# Altium PCB VirtualKeyBoardMouse_2020-04-23_12-54-28.pcbdoc
Units mil, origin at the board's own origin, x right, y up, seen from the top; angles counter-clockwise.
Board outline 4520 x 3570 mil, 2 copper layers (Top Layer, Bottom Layer); 33 components, 50 nets, 177 pads, 46 vias.
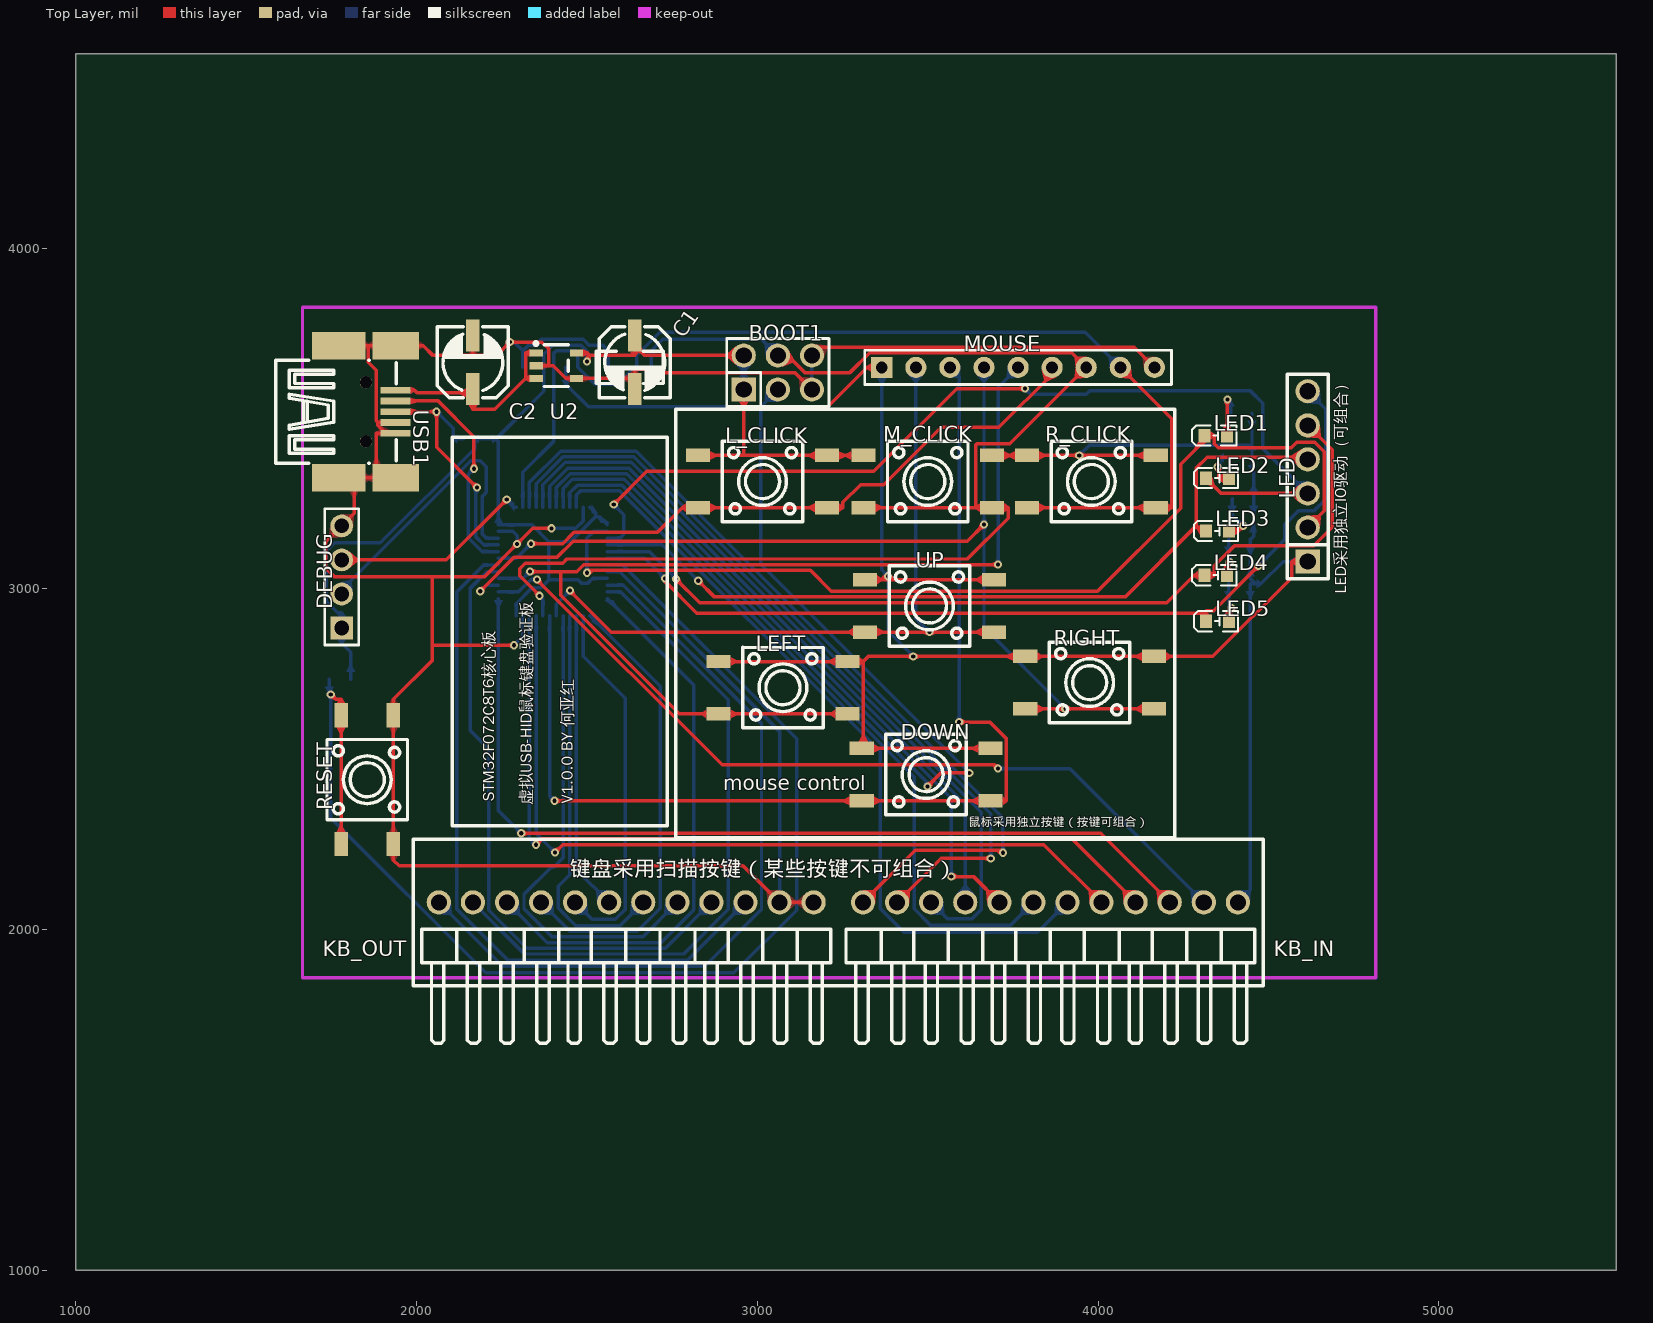
[diagram p0: Top Layer view]
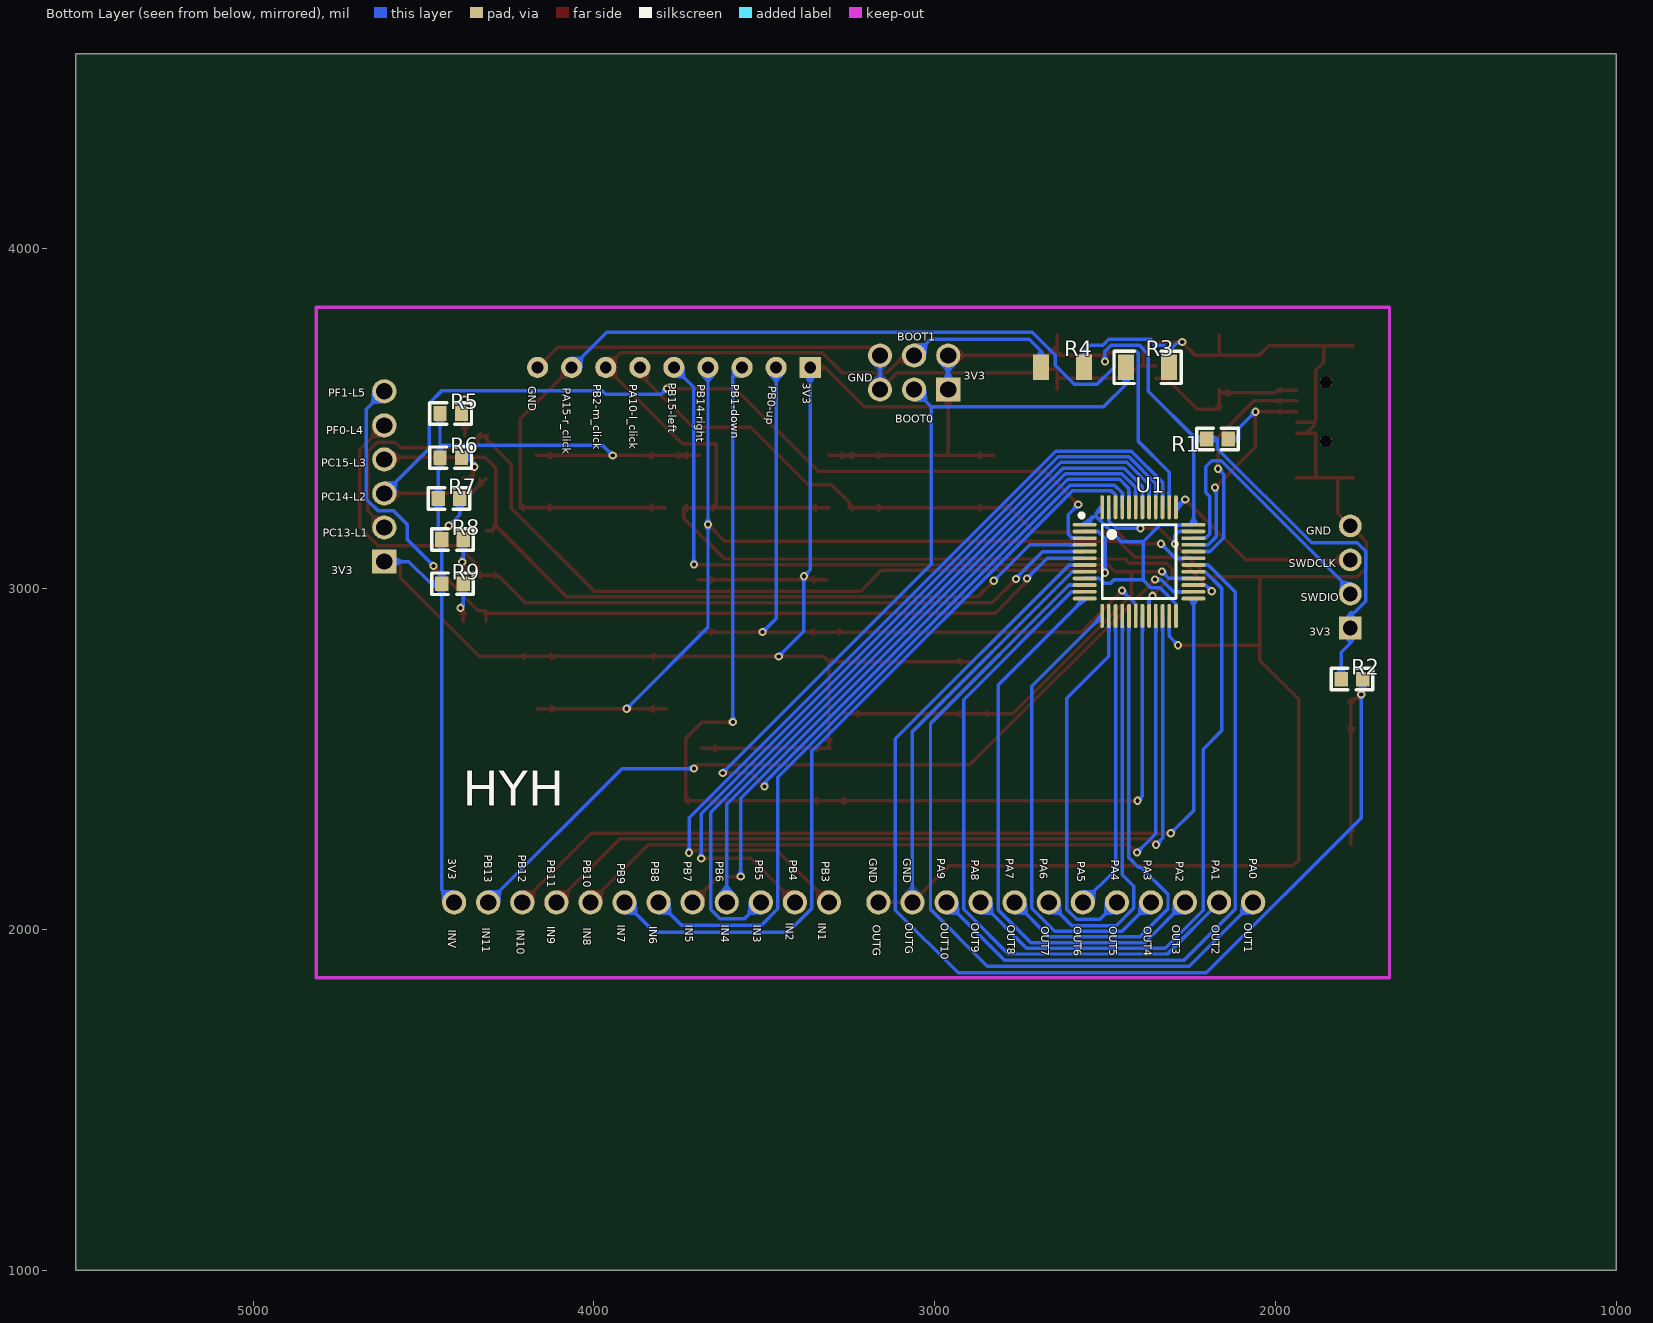
[diagram p1: Bottom Layer view, seen from below]

## Layer stack, top to bottom
Top Layer: signal copper (thickness not stored)
Dielectric: dielectric 12.6, FR-4, Dk 4.8
Bottom Layer: signal copper (thickness not stored)

## Board outline
5520,1000 1000,1000 1000,4570 5520,4570

## Components (designator, comment, footprint, x,y, rotation, side; value= is the part's Value field where it differs from the comment)
BOOT1 "210S-2*3P L=11.6MMGold-plated black" HDR-TH_6P-P2.54-V-R2-C3-S2.54 3060,3635 r0 top
C1 "100uF" CAP-SMD_BD5.0-L5.3-W5.3-FD 2640,3665 r270 top
C2 "100uF" CAP-SMD_BD5.0-L5.3-W5.3-FD 2165,3665 r90 top
DEBUG "MTP125-1104S1" HDR-TH_4P-P2.54-V 1780,3035 r90 top
DOWN "K2-6639SP-C4SC-04" KEY-SMD_4P-L6.0-W6.0-P3.90-LS10.0 3495,2455 r0 top
KB_IN "C247920" HDR-TH_12P-P2.54-H-W10.5 3860,2080 r0 top
KB_OUT "C247920" HDR-TH_12P-P2.54-H-W10.5 2615,2080 r0 top
L_CLICK "K2-6639SP-C4SC-04" KEY-SMD_4P-L6.0-W6.0-P3.90-LS10.0 3015,3315 r0 top
LED "210S-1*6P L=11.6MMGold-plated black" HDR-TH_6P-P2.54-V_Z-211-0611-0021-001 4615,3330 r90 top
LED1 "NCD0603R5" LED0603-RD 4345,3450 r0 top
LED2 "NCD0603R5" LED0603-RD 4350,3325 r0 top
LED3 "NCD0603R5" LED0603-RD 4350,3170 r0 top
LED4 "NCD0603R5" LED0603-RD 4345,3040 r0 top
LED5 "NCD0603R5" LED0603-RD 4350,2905 r0 top
LEFT "K2-6639SP-C4SC-04" KEY-SMD_4P-L6.0-W6.0-P3.90-LS10.0 3075,2710 r0 top
M_CLICK "K2-6639SP-C4SC-04" KEY-SMD_4P-L6.0-W6.0-P3.90-LS10.0 3500,3315 r0 top
MOUSE "220S-1*9P H=8.5MM Ytype Gold-plated" HDR-TH_9P-P2.54-V 3765,3650 r0 top
R1 "1K" R0603 2170,3440 r180 bottom
R2 "1K" R0603 1775,2735 r0 bottom
R3 "10K" R1206#1 2375,3650 r0 bottom
R4 "10K" R1206#2 2625,3650 r0 top
R5 "470" R0603 4420,3515 r0 bottom
R6 "470" R0603 4420,3385 r0 bottom
R7 "470" R0603 4425,3265 r0 bottom
R8 "470" R0603 4415,3145 r0 bottom
R9 "470" R0603 4415,3015 r0 bottom
R_CLICK "K2-6639SP-C4SC-04" KEY-SMD_4P-L6.0-W6.0-P3.90-LS10.0 3980,3315 r0 top
RESET "K2-6639SP-C4SC-04" KEY-SMD_4P-L6.0-W6.0-P3.90-LS10.0 1855,2440 r90 top
RIGHT "K2-6639SP-C4SC-04" KEY-SMD_4P-L6.0-W6.0-P3.90-LS10.0 3975,2725 r0 top
U1 "STM32F072CBT6" LQFP-48_L7.0-W7.0-P0.50-LS9.0-TL 2400,3080 r0 bottom
U2 "XC6219B332MR" SOT-23-5_L3.0-W1.7-P0.95-LS2.8-BL 2410,3655 r270 top
UP "K2-6639SP-C4SC-04" KEY-SMD_4P-L6.0-W6.0-P3.90-LS10.0 3505,2950 r0 top
USB1 "67503-1020" MICRO-USB-SMD_67503-1020 1855,3520 r270 top

## Footprints (in the part's own frame and the unit in brackets; to place one, negate y for a bottom-side part, rotate by r counter-clockwise, add the part's x,y. Pads: shape width x height; smd on the part's side, far side on the other; paste and mask are expansions set on the pad)
CAP-SMD_BD5.0-L5.3-W5.3-FD [mm]
  rect 2.4x1 smd: 1(-2,0) 2(2,0)
  silkscreen extent -2.65,-2.65 2.65,2.65
HDR-TH_4P-P2.54-V [mm]
  rect 1.7x1.7 hole 1.1: 1(-3.81,0)
  round 1.7 hole 1.1: 2(-1.27,0) 3(1.27,0) 4(3.81,0)
  silkscreen extent -5.08,-1.27 5.08,1.27
HDR-TH_6P-P2.54-V-R2-C3-S2.54 [mm]
  rect 1.8x1.8 hole 1.2: 1(-2.54,-1.27)
  round 1.8 hole 1.2: 2(-2.54,1.27) 3(0,-1.27) 4(0,1.27) 5(2.54,-1.27) 6(2.54,1.27)
  silkscreen extent -3.81,-2.54 3.81,2.54
HDR-TH_6P-P2.54-V_Z-211-0611-0021-001 [mm]
  rect 1.8x1.8 hole 1.2: 1(-6.35,0)
  round 1.8 hole 1.2: 2(-3.81,0) 3(-1.27,0) 4(1.27,0) 5(3.81,0) 6(6.35,0)
  silkscreen extent -7.62,-1.52 7.62,1.52
HDR-TH_9P-P2.54-V [mil]
  rect 62x62 hole 35: 1(-400,0)
  round 62 hole 35: 2(-300,0) 3(-200,0) 4(-100,0) 5(0,0) 6(100,0) 7(200,0) 8(300,0) 9(400,0)
  silkscreen extent -450,-50 450,50
HDR-TH_12P-P2.54-H-W10.5 [mm]
  round 1.8 hole 1.2: 1(-13.97,0) 2(-11.43,0) 3(-8.89,0) 4(-6.35,0) 5(-3.81,0) 6(-1.27,0) 7(1.27,0) 8(3.81,0) 9(6.35,0) 10(8.89,0) 11(11.43,0) 12(13.97,0)
  silkscreen extent -15.24,-10.5 15.24,-2
KEY-SMD_4P-L6.0-W6.0-P3.90-LS10.0 [mm]
  rect 1.8x1 smd: 1(-4.8,1.95) 2(4.8,1.95) 3(-4.8,-1.95) 4(4.8,-1.95)
  silkscreen extent -3,-3 3,3
LED0603-RD [mm]
  rect 0.9x1 smd: 1(-0.85,0) 2(0.85,0)
  silkscreen extent -1.75,-0.75 1.55,0.75
LQFP-48_L7.0-W7.0-P0.50-LS9.0-TL [mm]
  oval 1.796x0.28 smd: 1(4.05,-2.75) 2(4.05,-2.25) 3(4.05,-1.75) 4(4.05,-1.25) 5(4.05,-0.75) 6(4.05,-0.25) 7(4.05,0.25) 8(4.05,0.75) 9(4.05,1.25) 10(4.05,1.75) 11(4.05,2.25) 12(4.05,2.75) 25(-4.05,2.75) 26(-4.05,2.25) 27(-4.05,1.75) 28(-4.05,1.25) 29(-4.05,0.75) 30(-4.05,0.25) 31(-4.05,-0.25) 32(-4.05,-0.75) 33(-4.05,-1.25) 34(-4.05,-1.75) 35(-4.05,-2.25) 36(-4.05,-2.75)
  oval 0.28x1.796 smd: 13(2.75,4.05) 14(2.25,4.05) 15(1.75,4.05) 16(1.25,4.05) 17(0.75,4.05) 18(0.25,4.05) 19(-0.25,4.05) 20(-0.75,4.05) 21(-1.25,4.05) 22(-1.75,4.05) 23(-2.25,4.05) 24(-2.75,4.05) 37(-2.75,-4.05) 38(-2.25,-4.05) 39(-1.75,-4.05) 40(-1.25,-4.05) 41(-0.75,-4.05) 42(-0.25,-4.05) 43(0.25,-4.05) 44(0.75,-4.05) 45(1.25,-4.05) 46(1.75,-4.05) 47(2.25,-4.05) 48(2.75,-4.05)
  silkscreen extent -2.75,-3.6 4.42,2.75
MICRO-USB-SMD_67503-1020 [mm]
  rect 0.5x2.25 smd: 1(-1.6,2.1) 2(-0.8,2.1) 3(0,2.1) 4(0.8,2.1) 5(1.6,2.1)
  rect 2.05x3.5 smd: 6(-4.925,2.125) 6(4.925,2.125)
  rect 2.05x4 smd: 6(-4.925,-2.125) 6(4.925,-2.125)
  round 0.914 hole 0.914: ""(-2.2,-0.1) ""(2.2,-0.1)
  silkscreen extent -3.85,-6.82 3.85,2.18
R0603 [mm]
  rect 1x1.1 smd: 1(0.8,0) 2(-0.8,0)
  silkscreen extent -1.55,-0.81 1.55,0.8
R1206#1 [mm]
  rect 1.2x1.9 smd: 1(1.6,0) 2(-1.6,0)
  silkscreen extent -2.5,-1.2 2.5,1.2
R1206#2 [mm]
  rect 1.2x1.9 smd far side: 1(-1.6,0) 2(1.6,0)
  silkscreen extent -2.5,-1.2 2.5,1.2
SOT-23-5_L3.0-W1.7-P0.95-LS2.8-BL [mm]
  rect 0.55x1 smd: 1(-0.95,-1.5) 2(0,-1.5) 3(0.95,-1.5) 4(0.95,1.5) 5(-0.95,1.5)
  silkscreen extent -1.78,-1.65 1.55,0.9

## Via types
v1: diameter 24.02, hole 12.2, Top Layer to Bottom Layer, 46 vias

## Nets (pads, with @x,y where several pads share a name; then routed paths per layer and width w, separated by ;. In a path a pad name is that pad's centre, name@x,y a point inside that pad or via, vN(x,y) a via of type N, cw(c..) or ccw(c..) an arc to the next point about the centre after c; other vN are vias at no path point)
3V3: BOOT1.1 BOOT1.2 C1.1 DEBUG.1 DOWN.1 DOWN.2 KB_IN.12 L_CLICK.1 L_CLICK.2 LED.1 LEFT.1 LEFT.2 M_CLICK.1 M_CLICK.2 MOUSE.1 R1.2 R2.1 R5.1 R6.1 R7.1 R8.1 R9.1 R_CLICK.1 R_CLICK.2 RIGHT.1 RIGHT.2 U1.1 U1.9 U1.24 U1.36 U1.48 U2.5 UP.1 UP.2 | length 10943.4
  Top Layer w10.24: U2.5 2500.3,3692.4 2507.7,3685 ; v1(2500.3,3667.1) 2500.3,3677.6 2507.7,3685 ; C1.1 C1.1@2640,3714.3 ; L_CLICK.1 2960,3391.8 ; LEFT.1 LEFT.2 3310.9,2786.8 ; BOOT1.1 2960,3534.3 ; BOOT1.2 2669.4,3685 C1.1@2640,3714.3 ; DOWN.1 DOWN.1@3310.9,2531.8 ; M_CLICK.1 L_CLICK.2 2960,3391.8 ; UP.1 3363,3026.8 ; MOUSE.1 3322.5,3650 3206.8,3534.3 2960,3534.3 ; v1(3383.7,3037.2) 3373.4,3037.2 3363,3026.8 ; DOWN.2 DOWN.1@3310.9,2531.8 ; M_CLICK.2 R_CLICK.1 v1(3944.3,3391.8) R_CLICK.2 ; UP.2 3363,3026.8 ; LED.1 4568.1,3080 4568.1,3033.1 4336.8,2801.8 4210.9,2801.8 RIGHT.2 3833,2801.8 3809.5,2801.8 RIGHT.1 v1(3457.2,2801.8) 3325.9,2801.8 3310.9,2786.8 ; 2507.7,3685 2640,3685 C1.1@2640,3714.3 ; 2960,3391.8 2960,3534.3 ; DOWN.1@3310.9,2531.8 3310.9,2786.8
  Bottom Layer w10.24: R2.1 1806.5,2813.5 1780,2840 DEBUG.1 1780,2930 1768.8,2930 1735,2963.7 1735,3110.6 1759.5,3135 1893.6,3135 2170.3,3411.7 2170.3,3440 R1.2 2217.1,3440 2232.7,3440 ; U1.24@2291.8,2921.1 2291.8,2956.9 2338.5,3003.6 2365.6,3003.6 2388.1,3026.2 ; v1(2500.3,3667.1) 2500.3,3696.8 2481.5,3715.6 2399.7,3715.6 2372.5,3688.3 2372.5,3579.8 2232.7,3440 ; U1.48@2508.3,3240 2525.3,3223 2525.3,3212.4 ; U1.9@2559.2,3030.7 2516.3,3030.7 2502.7,3017.2 2483.2,3017.2 2474.2,3026.2 2388.1,3026.2 ; U1.1@2559.2,3188.2 2535,3212.4 2525.3,3212.4 ; BOOT1.1 BOOT1.2 ; MOUSE.1 3365,3055.9 v1(3383.7,3037.2) 3383.7,2875.2 v1(3457.2,2801.8) ; v1(3944.3,3391.8) 3973.4,3420.9 4451.5,3420.9 ; KB_IN.12 4446.5,2116.5 R9.1 R9.1@4462.1,3015 ; R5.1 4451.5,3420.9 ; LED.1 4542.7,3080 4477.7,3015 R9.1@4462.1,3015 ; 2232.7,3440 2240,3432.7 2240,3188.2 2338.5,3188.2 2388.1,3138.6 ; 2388.1,3026.2 2388.1,3138.6 ; 2388.1,3138.6 2451.5,3138.6 2525.3,3212.4 ; 4451.5,3420.9 R6.1 4451.5,3351.8 4456.5,3346.8 4456.5,3298.2 4456.5,3280.5 R7.1 4456.5,3155 R8.1 4446.5,3030.6 R9.1@4462.1,3015
+5V: C2.1 U2.1 U2.3 USB1.1 | length 618.5
  Top Layer w10.24: USB1.1 1993.5,3583 2001.1,3575.4 C2.1@2165,3575.4 ; C2.1@2165,3586.2 C2.1@2165,3575.4 ; U2.3 2319.8,3617.6 ; U2.1 2319.8,3692.4 2319.8,3617.6 ; C2.1@2165,3575.4 2165,3527.5 2229.7,3527.5 2319.8,3617.6
BOOT0: BOOT1.3 R3.1 U1.44 | length 3701.2
  Top Layer w10.24: v1(3499.3,2420.2) 3538.9,2459.9 v1(3621.9,2459.9)
  Bottom Layer w10.24: U1.44@2429.6,3240 2429.6,3293.6 2457.1,3321.2 2609.5,3321.2 3499.3,2431.4 v1(3499.3,2420.2) ; R3.1 2438,3601.1 2504.3,3534.8 3009.8,3534.8 ; BOOT1.3 3009.8,3534.8 ; v1(3621.9,2459.9) 3009.8,3072 3009.8,3534.8
BOOT1: BOOT1.4 M_CLICK.3 M_CLICK.4 MOUSE.7 R4.2 U1.20 | length 4142.5
  Top Layer w10.24: v1(2360.9,2979.6) 2302.1,3038.4 2302.1,3059 2318.8,3075.7 2428.5,3075.7 2440.5,3087.7 3616.3,3087.7 3735.9,3207.3 3735.9,3238.2 M_CLICK.4 3640.4,3238.2 ; BOOT1.4 3088.6,3685 3138.6,3635 3271.7,3635 3329.2,3692.5 3922.5,3692.5 MOUSE.7 3740.4,3425.4 3643.4,3425.4 3640.4,3422.4 3640.4,3238.2 ; M_CLICK.3 3640.4,3238.2
  Bottom Layer w10.24: v1(2360.9,2979.6) 2370.5,2970 U1.20@2370.5,2921.1 ; R4.2 2688,3698.9 2722.2,3733.1 3011.9,3733.1 BOOT1.4
GND: BOOT1.5 BOOT1.6 C1.2 C2.2 DEBUG.4 KB_OUT.11 KB_OUT.12 MOUSE.9 R3.2 R4.1 RESET.3 RESET.4 U1.8 U1.23 U1.35 U1.47 U2.2 U2.4 USB1.4 USB1.5 USB1.6 | length 8879.3
  Top Layer w10.24: USB1.6@1771.3,3326.1 USB1.6@1816.5,3326.1 ; USB1.6@1771.3,3713.9 1858.3,3713.9 ; USB1.5 USB1.5@1909.8,3457 ; USB1.4 1886.1,3488.5 ; USB1.6@1938.7,3326.1 USB1.6@1881.9,3326.1 ; C2.2 2165,3685 ; v1(2285.6,2834.6) 2045.6,2834.6 ; U2.2 2387.1,3655 ; v1(2395.6,3177.7) 2340.5,3177.7 v1(2294.7,3132) 2197.8,3035 2045.6,3035 ; C1.2@2640,3586.2 C1.2@2640,3617.6 ; BOOT1.5 3110,3635 2688.7,3635 2678.7,3645 2640,3645 C1.2@2640,3617.6 ; BOOT1.6 3184.2,3709.2 4105.8,3709.2 MOUSE.9 ; KB_OUT.12 KB_OUT.11 2957.6,2187.4 1948.4,2187.4 1931.8,2204.1 RESET.3 RESET.4 1931.8,2675.9 2045.6,2789.7 2045.6,2834.6 ; USB1.6@1816.5,3326.1 USB1.6@1881.9,3326.1 ; USB1.6@1816.5,3326.1 1816.5,3221.5 DEBUG.4 1733.6,3138.6 1733.6,3060.8 1759.5,3035 2045.6,3035 ; 1858.3,3713.9 1938.7,3713.9 2019.1,3713.9 2048,3685 2165,3685 ; 1858.3,3713.9 1858.3,3665 1881.9,3641.4 1881.9,3492.7 1886.1,3488.5 ; USB1.6@1881.9,3326.1 1881.9,3457 USB1.5@1909.8,3457 ; 1886.1,3488.5 1886.1,3480.7 USB1.5@1909.8,3457 ; 2045.6,2834.6 2045.6,3035 ; 2165,3685 2234.3,3685 v1(2273.4,3724.1) 2367.5,3724.1 2387.1,3704.4 2387.1,3655 ; 2387.1,3655 2400.5,3655 2437.9,3617.6 2453.5,3617.6 U2.4 C1.2@2640,3617.6
  Bottom Layer w10.24: U1.35@2240,3168.6 2281.9,3168.6 2294.7,3155.7 v1(2294.7,3132) ; v1(2273.4,3724.1) 2286.9,3724.1 2312,3698.9 ; v1(2285.6,2834.6) 2311.4,2860.5 U1.23@2311.4,2921.1 ; R3.2 2312,3698.9 ; v1(2395.6,3177.7) 2467.1,3177.7 2488.6,3199.3 U1.47@2488.6,3239.7 ; U1.8@2559.2,3050.4 2596.2,3050.4 3065,2581.6 KB_OUT.11 ; R4.1 2562,3698.9 2545.4,3715.6 2505.1,3715.6 2488.4,3732.2 2365.6,3732.2 2355.8,3722.5 2355.8,3715.6 2328.7,3715.6 2312,3698.9 ; BOOT1.5 BOOT1.6
NRST: R2.2 RESET.1 RESET.2 U1.7 | length 3771.7
  Top Layer w10.24: v1(1748.1,2690.3) 1762.5,2675.9 1778.2,2675.9 RESET.2 RESET.1
  Bottom Layer w10.24: R2.2 1743.5,2694.9 v1(1748.1,2690.3) 1748.1,2327.5 2202.4,1873.2 2931.1,1873.2 3115,2057.1 3115,2560.2 2605.1,3070.1 U1.7@2559.2,3070.1
PA0: KB_OUT.1 U1.10 | length 2259.8
  Bottom Layer w10.24: KB_OUT.1 2252.1,1892.9 2845.1,1892.9 3012,2059.8 3012,2604.8 2605.8,3011.1 U1.10@2559.2,3011.1
PA1: KB_OUT.2 U1.11 | length 1969
  Bottom Layer w10.24: KB_OUT.2 2316.5,1928.5 2783.8,1928.5 2915,2059.7 2915,2674.6 2598.2,2991.4 U1.11@2559.2,2991.4
PA2: KB_OUT.3 U1.12 | length 1655.8
  Bottom Layer w10.24: KB_OUT.3 2383.2,1961.8 2717.1,1961.8 2813,2057.7 2813,2717.9 U1.12@2559.2,2971.7
PA3: KB_OUT.4 U1.13 | length 1357
  Bottom Layer w10.24: KB_OUT.4 2449.9,1995.1 2647.1,1995.1 2715,2063 2715,2714.4 U1.13@2508.3,2921.1
PA4: KB_OUT.5 U1.14 | length 1092.4
  Bottom Layer w10.24: KB_OUT.5 2514.7,2030.3 2583.3,2030.3 2612,2059 2612,2678.7 2488.6,2802.1 U1.14@2488.6,2920.8
PA5: KB_OUT.6 U1.15 | length 880.6
  Bottom Layer w10.24: U1.15@2468.9,2920.8 2468.9,2176.1 KB_OUT.6
PA6: KB_OUT.7 U1.16 | length 1171.1
  Bottom Layer w10.24: U1.16@2449.2,2920.8 2449.2,2161.1 2415,2126.9 2415,2063.5 2466.7,2011.8 2596.8,2011.8 KB_OUT.7
PA7: KB_OUT.8 U1.17 | length 1438.4
  Bottom Layer w10.24: U1.17@2429.6,2921.1 2429.6,2210.5 2402.4,2183.3 2394.6,2183.3 2315,2103.7 2315,2060.9 2397.4,1978.5 2663.5,1978.5 KB_OUT.8
PA8: KB_OUT.9 U1.29 | length 1825.3
  Bottom Layer w10.24: U1.29@2240,3050.4 2205.7,3050.4 2157.9,3002.6 2157.9,2584 2212,2529.9 2212,2056.6 2323.4,1945.2 2730.2,1945.2 KB_OUT.9
PA9: KB_OUT.10 U1.30 | length 2065.3
  Bottom Layer w10.24: U1.30@2240,3070.1 2196.9,3070.1 2117,2990.3 2117,2061.6 2267.8,1910.8 2795.8,1910.8 KB_OUT.10
PA10: L_CLICK.3 L_CLICK.4 MOUSE.6 U1.31 | length 1877.7
  Top Layer w10.24: v1(2335.7,3132.5) 2428.5,3132.5 2461.8,3165.8 2706.7,3165.8 2779.1,3238.2 L_CLICK.3 L_CLICK.4 3250.9,3238.2 3250.9,3253.8 3302.8,3305.7 3370.7,3305.7 3539,3474 3708.7,3474 3865,3630.3 MOUSE.6
  Bottom Layer w10.24: U1.31@2240,3089.8 2293,3089.8 v1(2335.7,3132.5)
PA15: MOUSE.8 R_CLICK.3 R_CLICK.4 U1.38 | length 3244.3
  Top Layer w10.24: R_CLICK.3 R_CLICK.4 4215.9,3238.2 4215.9,3499.1 MOUSE.8
  Bottom Layer w10.24: U1.38@2311.4,3240 2311.4,3342.6 2402.9,3434 2402.9,3692.2 2409.6,3698.9 2470.2,3698.9 2473.2,3695.9 2473.2,3650.4 2523.4,3600.2 2589.7,3600.2 2646.3,3656.8 2646.3,3685.6 2713.4,3752.7 3962.3,3752.7 MOUSE.8
PB0: MOUSE.2 U1.18 UP.3 UP.4 | length 2178.3
  Top Layer w10.24: v1(2449.6,2994.8) 2571.2,2873.2 3269.1,2873.2 UP.3 v1(3505,2873.2) UP.4
  Bottom Layer w10.24: U1.18@2409.9,2921.1 2409.9,2955.1 v1(2449.6,2994.8) ; MOUSE.2 3465,2913.2 v1(3505,2873.2)
PB1: DOWN.3 DOWN.4 MOUSE.3 U1.19 | length 3268.4
  Top Layer w10.24: v1(2404.1,2378.2) DOWN.3 DOWN.4 3730.9,2378.2 3730.9,2560 3681.6,2609.3 v1(3592.1,2609.3)
  Bottom Layer w10.24: U1.19@2390.2,2921.1 2390.2,2392.1 v1(2404.1,2378.2) ; MOUSE.3 3592.1,3622.9 v1(3592.1,2609.3)
PB3: KB_IN.1 U1.39 | length 2525.3
  Top Layer w10.24: KB_IN.1 3462.8,2232.8 3713.3,2232.8 v1(3720.5,2225.5)
  Bottom Layer w10.24: U1.39@2331.1,3240 2331.1,3312.9 2422.6,3404.4 2644,3404.4 3720.5,2327.9 v1(3720.5,2225.5)
PB4: KB_IN.2 U1.40 | length 2329.1
  Top Layer w10.24: KB_IN.2 3539.3,2209.2 v1(3685,2209.2)
  Bottom Layer w10.24: U1.40@2350.8,3240 2350.8,3309.1 2429.5,3387.8 2637.1,3387.8 3685,2339.9 v1(3685,2209.2)
PB5: KB_IN.3 U1.41 | length 2268.2
  Bottom Layer w10.24: U1.41@2370.5,3240 2370.5,3305.2 2436.4,3371.1 2630.2,3371.1 3657,2344.3 3657,2059.1 3629.1,2031.3 3558.7,2031.3 KB_IN.3
PB6: KB_IN.4 U1.42 | length 1999.7
  Bottom Layer w10.24: U1.42@2390.2,3240 2390.2,3301.3 2443.3,3354.5 2623.3,3354.5 3610,2367.8 KB_IN.4
PB7: KB_IN.5 U1.43 | length 2029.6
  Top Layer w10.24: v1(3569.1,2155.8) 3634.2,2155.8 KB_IN.5
  Bottom Layer w10.24: U1.43@2409.9,3240 2409.9,3297.5 2450.2,3337.8 2616.4,3337.8 3569.1,2385.1 v1(3569.1,2155.8)
PB8: KB_IN.6 U1.45 | length 2200.7
  Bottom Layer w10.24: U1.45@2449.2,3239.7 2449.2,3281.6 2472.1,3304.5 2602.6,3304.5 3460,2447.1 3460,2061 3507.5,2013.5 3743.5,2013.5 KB_IN.6
PB9: KB_IN.7 U1.46 | length 2325.2
  Bottom Layer w10.24: U1.46@2468.9,3239.7 2468.9,3275.5 2480.8,3287.4 2596.2,3287.4 3360,2523.6 3360,2062.1 3430.1,1992 3822,1992 KB_IN.7
PB10: KB_IN.8 U1.21 | length 2400.9
  Top Layer w10.24: v1(2405.7,2226.8) 2428.3,2249.4 3840.6,2249.4 KB_IN.8
  Bottom Layer w10.24: U1.21@2350.8,2921.1 2350.8,2281.7 v1(2405.7,2226.8)
PB11: KB_IN.9 U1.22 | length 2524.2
  Top Layer w10.24: v1(2349.9,2249) 2366.9,2266.1 3923.9,2266.1 KB_IN.9
  Bottom Layer w10.24: U1.22@2331.1,2921.1 2331.1,2267.8 v1(2349.9,2249)
PB12: KB_IN.10 U1.25 | length 2703.8
  Top Layer w10.24: v1(2306.9,2282.7) 4007.3,2282.7 KB_IN.10
  Bottom Layer w10.24: U1.25@2240,2971.7 2240,2349.6 v1(2306.9,2282.7)
PB13: KB_IN.11 U1.26 | length 2477.1
  Top Layer w10.24: v1(2352.8,3027.1) 2896.5,2483.4 3695.5,2483.4 v1(3706.2,2472.7)
  Bottom Layer w10.24: U1.26@2240,2991.4 2299,2991.4 2334.7,3027.1 v1(2352.8,3027.1) ; v1(3706.2,2472.7) 3917.3,2472.7 KB_IN.11
PB14: MOUSE.4 RIGHT.3 RIGHT.4 U1.27 | length 3099
  Top Layer w10.24: v1(2186.6,2993.2) 2285.8,3092.3 2411.9,3092.3 2459.7,3140.1 3616.1,3140.1 v1(3665,3189.1) ; RIGHT.3 v1(3903.7,2648.2) RIGHT.4
  Bottom Layer w10.24: v1(2186.6,2993.2) 2204.5,3011.1 U1.27@2240,3011.1 ; MOUSE.4 v1(3665,3189.1) 3665,2886.9 v1(3903.7,2648.2)
PB15: LEFT.3 LEFT.4 MOUSE.5 U1.28 | length 3140.8
  Top Layer w10.24: v1(2332.5,3050.7) 2423.3,3050.7 ; LEFT.4 3217,2633.2 LEFT.3 2839.1,2633.2 2770.9,2633.2 2423.3,2980.8 2423.3,3050.7 ; v1(3706.5,3071.3) 3706.3,3071 2490,3071 2469.7,3050.7 2423.3,3050.7
  Bottom Layer w10.24: U1.28@2240,3030.8 2312.6,3030.8 v1(2332.5,3050.7) ; v1(3706.5,3071.3) 3706.5,3591.5 MOUSE.5
PC13: LED1.1 LED.2 U1.2 | length 2931.1
  Top Layer w10.24: v1(2499.6,3047.3) 2506.7,3054.4 3155.8,3054.4 3217.2,2993 3998,2993 4242.2,3237.2 4242.2,3366 LED1.1@4326.2,3450 ; LED1.1 LED1.1@4326.2,3450 ; LED.2 4664.1,3229.1 4664.1,3402 4636.1,3430 4582.9,3430 4566.7,3413.9 4352.5,3413.9 4340.8,3425.6 4340.8,3450 LED1.1@4326.2,3450
  Bottom Layer w10.24: v1(2499.6,3047.3) 2499.6,3148.3 2519.8,3168.5 U1.2@2559.2,3168.5
PC14: LED2.1 LED.3 U1.3 | length 2861.5
  Top Layer w10.24: v1(2578.4,3247.7) 2675.6,3344.9 3342,3344.9 3584.9,3587.8 v1(3785.4,3587.8) ; LED2.1 4361.5,3280 LED.3
  Bottom Layer w10.24: U1.3@2559.2,3148.9 2596.7,3148.9 2608.2,3160.4 2608.2,3217.8 v1(2578.4,3247.7) ; v1(3785.4,3587.8) 3802,3571.2 3965.3,3571.2 3975,3580.9 4447.1,3580.9 4482.9,3545.2 4482.9,3412.1 LED.3
PC15: LED3.1 LED.4 U1.4 | length 2426.1
  Top Layer w10.24: v1(2826.2,3024.1) 2874,2976.3 4079,2976.3 4287.3,3184.6 ; LED3.1 4301.9,3170 4287.3,3184.6 ; LED.4 4608.4,3386.6 4320.4,3386.6 4287.3,3353.6 4287.3,3184.6
  Bottom Layer w10.24: U1.4@2559.2,3129.2 2721.2,3129.2 v1(2826.2,3024.1)
PF0: LED4.1 LED.5 U1.5 | length 2627.9
  Top Layer w10.24: v1(2761.2,3028.6) 2830.4,2959.4 4201.7,2959.4 4282.3,3040 LED4.1 4326.2,3040 4340.8,3040 4340.8,3067.4 4400.3,3126.9 4632.7,3126.9 4686.6,3180.8 4686.6,3408.4 LED.5
  Bottom Layer w10.24: U1.5@2559.2,3109.5 2683.3,3109.5 2761.2,3031.6 v1(2761.2,3028.6)
PF1: LED5.1 LED.6 U1.6 | length 2712
  Top Layer w10.24: v1(2728.7,3030.9) 2728.7,3022.1 2822.4,2928.4 4316.5,2928.4 ; LED5.1 4316.5,2928.4 ; v1(4470.2,3067.1) 4339.3,2936.2 4316.5,2936.2 4316.5,2928.4
  Bottom Layer w10.24: U1.6@2559.2,3089.8 2669.8,3089.8 v1(2728.7,3030.9) ; v1(4470.2,3067.1) 4547,3143.9 4547,3187.9 4589.1,3230 4634.6,3230 4668.1,3263.4 4668.1,3526.9 LED.6
R5_2: LED1.2 R5.2 | length 151.8
  Top Layer w10.24: LED1.2 4378.5,3554.8 v1(4379.7,3556.1)
  Bottom Layer w10.24: v1(4379.7,3556.1) 4387.6,3548.2 4388.5,3548.2 R5.2
R6_2: LED2.2 R6.2 | length 125.1
  Top Layer w10.24: v1(4350.2,3358.2) 4354.2,3354.2 4354.2,3325 LED2.2
  Bottom Layer w10.24: v1(4350.2,3358.2) 4357.3,3365.3 4357.3,3385 R6.2
R7_2: LED3.2 R7.2 | length 143.1
  Top Layer w10.24: LED3.2 4412.7,3170 4412.7,3172 v1(4425.9,3185.2)
  Bottom Layer w10.24: R7.2 4393.5,3217.5 v1(4425.9,3185.2)
R8_2: LED4.2 R8.2 | length 109.4
  Top Layer w10.24: LED4.2 4378.5,3071.2 v1(4386.3,3079)
  Bottom Layer w10.24: R8.2 4383.5,3081.7 v1(4386.3,3079)
R9_2: LED5.2 R9.2 | length 116.2
  Top Layer w10.24: LED5.2 4383.5,2936.2 v1(4391,2943.7)
  Bottom Layer w10.24: R9.2 4383.5,2951.2 v1(4391,2943.7)
S$41: 
S$43: 
S$45: 
SWDCLK: DEBUG.3 U1.37 | length 594.5
  Top Layer w10.24: DEBUG.3 2087.3,3085 v1(2264.6,3262.3)
  Bottom Layer w10.24: v1(2264.6,3262.3) 2286.8,3240 U1.37@2291.8,3240
SWDIO: DEBUG.2 U1.34 | length 855.5
  Bottom Layer w10.24: DEBUG.2 1780,2997.8 2158.8,3376.6 2186.3,3376.6 2204.1,3358.8 2204.1,3282.9 2193.2,3271.9 2193.2,3160.6 2204.9,3148.9 U1.34@2240,3148.9
USBDM: U1.32 USB1.2 | length 682.4
  Top Layer w10.24: USB1.2 2062.8,3551.5 2168.1,3446.3 v1(2168.1,3352.6)
  Bottom Layer w10.24: v1(2168.1,3352.6) 2151.4,3335.9 2151.4,3150.3 2192.2,3109.5 U1.32@2240,3109.5
USBDP: R1.1 U1.33 USB1.3 | length 745.4
  Top Layer w10.24: USB1.3 v1(2058.5,3520) 2058.5,3415.7 v1(2176.7,3297.5)
  Bottom Layer w10.24: v1(2058.5,3520) 2107.3,3471.2 2107.3,3440 R1.1 ; v1(2176.7,3297.5) 2174.1,3294.9 2174.1,3152.3 2197.2,3129.2 U1.33@2240,3129.2
pads on no net: USB1.

## Polygon pours and split planes (outlines as drawn)
GND on Bottom Layer (solid): 1500,4055 1510,4070 1510.43,4054.76 4980,3975 5020,1500 1580,1590 1510.43,4054.76 1500,4055
GND on Top Layer (solid): 1565,3985 1580,1620 4910,1500 4910,3935 1560,4015

## Other copper
Top Layer:
  region net +5V: 2145.31,3562.61 2145.31,3588.2 2129.96,3580.52 2129.96,3570.28
  region net +5V: 2177.8,3539.02 2152.2,3539.02 2159.88,3527.5 2170.12,3527.5
  region net 3V3: 2659.68,3709.62 2637.71,3696.49 2657,3690.13 2666.07,3695.55
  region net 3V3: 2652.8,3696.49 2627.2,3696.49 2634.88,3685 2645.12,3685
  region net +5V: 2331.26,3681.57 2331.26,3703.23 2319.8,3697.52 2319.8,3687.28
  region net +5V: 2331.26,3606.77 2331.26,3628.43 2319.8,3622.72 2319.8,3612.48
  region net 3V3: 2488.75,3703.23 2488.75,3681.57 2500.3,3687.28 2500.3,3697.52
  region net PB1: 3648.54,2365.41 3648.54,2391 3633.19,2383.32 3633.19,2373.08
  region net PB1: 3719.41,2391 3719.41,2365.41 3730.9,2373.08 3730.9,2383.32
  region net PB1: 3341.46,2391 3341.46,2365.41 3356.81,2373.08 3356.81,2383.32
  region net PB1: 3270.59,2365.41 3270.59,2391 3255.24,2383.32 3255.24,2373.08
  region net 3V3: 3648.54,2519 3648.54,2544.59 3633.19,2536.92 3633.19,2526.68
  region net 3V3: 3298.1,2551.46 3323.69,2551.46 3316.02,2566.81 3305.78,2566.81
  region net 3V3: 3341.46,2544.59 3341.46,2519 3356.81,2526.68 3356.81,2536.92
  region net PB14: 4128.54,2635.41 4128.54,2661 4113.19,2653.32 4113.19,2643.08
  region net PB14: 3821.46,2661 3821.46,2635.41 3836.81,2643.08 3836.81,2653.32
  region net 3V3: 4199.41,2814.59 4199.41,2789 4210.9,2796.68 4210.9,2806.92
  region net 3V3: 4128.54,2789 4128.54,2814.59 4113.19,2806.92 4113.19,2796.68
  region net 3V3: 3750.59,2789 3750.59,2814.59 3735.24,2806.92 3735.24,2796.68
  region net 3V3: 3821.46,2814.59 3821.46,2789 3833,2796.68 3833,2806.92
  region net PB15: 3228.54,2620.41 3228.54,2646 3217,2638.32 3217,2628.08
  region net PB15: 2850.59,2620.41 2850.59,2646 2839.1,2638.32 2839.1,2628.08
  region net PB15: 2921.46,2646 2921.46,2620.41 2936.81,2628.08 2936.81,2638.32
  region net 3V3: 3299.41,2799.59 3299.41,2774 3310.9,2781.68 3310.9,2791.92
  region net 3V3: 3228.54,2774 3228.54,2799.59 3213.19,2791.92 3213.19,2781.68
  region net 3V3: 2921.46,2799.59 2921.46,2774 2936.81,2781.68 2936.81,2791.92
  region net PA10: 3168.5,3225.41 3168.5,3251 3153.15,3243.32 3153.15,3233.08
  region net PA10: 3239.4,3251 3239.4,3225.41 3250.9,3233.08 3250.9,3243.32
  region net PA10: 2790.6,3225.41 2790.6,3251 2779.1,3243.32 2779.1,3233.08
  region net PA10: 2861.5,3251 2861.5,3225.41 2876.85,3233.08 2876.85,3243.32
  region net 3V3: 3168.5,3379 3168.5,3404.59 3153.15,3396.92 3153.15,3386.68
  region net 3V3: 3239.4,3404.59 3239.4,3379 3254.75,3386.68 3254.75,3396.92
  region net 3V3: 2861.5,3404.59 2861.5,3379 2876.85,3386.68 2876.85,3396.92
  region net NRST: 1765.41,2664.41 1791,2664.41 1783.32,2675.9 1773.08,2675.9
  region net NRST: 1791,2593.54 1765.41,2593.54 1773.08,2578.19 1783.32,2578.19
  region net NRST: 1765.41,2286.46 1791,2286.46 1783.32,2301.81 1773.08,2301.81
  region net BOOT1: 3724.41,3251 3724.41,3225.41 3735.9,3233.08 3735.9,3243.32
  region net BOOT1: 3653.54,3225.41 3653.54,3251 3640.4,3243.32 3640.4,3233.08
  region net BOOT1: 3346.46,3251 3346.46,3225.41 3361.81,3233.08 3361.81,3243.32
  region net 3V3: 3724.41,3404.59 3724.41,3379 3739.76,3386.68 3739.76,3396.92
  region net 3V3: 3275.59,3379 3275.59,3404.59 3260.24,3396.92 3260.24,3386.68
  region net PB0: 3658.54,2860.41 3658.54,2886 3643.19,2878.32 3643.19,2868.08
  region net PB0: 3280.59,2860.41 3280.59,2886 3269.1,2878.32 3269.1,2868.08
  region net PB0: 3351.46,2886 3351.46,2860.41 3366.81,2868.08 3366.81,2878.32
  region net 3V3: 3658.54,3014 3658.54,3039.59 3643.19,3031.92 3643.19,3021.68
  region net 3V3: 3351.46,3039.59 3351.46,3014 3363,3021.68 3363,3031.92
  region net PA15: 4133.5,3225.41 4133.5,3251 4118.15,3243.32 4118.15,3233.08
  region net PA15: 4204.4,3251 4204.4,3225.41 4215.9,3233.08 4215.9,3243.32
  region net PA15: 3826.5,3251 3826.5,3225.41 3841.85,3233.08 3841.85,3243.32
  region net 3V3: 4133.5,3379 4133.5,3404.59 4118.15,3396.92 4118.15,3386.68
  region net 3V3: 3755.6,3379 3755.6,3404.59 3740.25,3396.92 3740.25,3386.68
  region net 3V3: 3826.5,3404.59 3826.5,3379 3841.85,3386.68 3841.85,3396.92
  region net USBDP: 1981.97,3529.84 1981.97,3510.15 1997.32,3514.88 1997.32,3525.12
  region net USBDM: 1981.97,3561.34 1981.97,3541.65 1997.32,3546.38 1997.32,3556.62
  region net +5V: 1981.97,3592.84 1981.97,3573.15 1993.5,3577.88 1993.5,3588.12
  region net 3V3: 2972.8,3549.57 2947.2,3549.57 2954.88,3534.3 2965.12,3534.3
  region net R5_2: 4365.71,3469.68 4391.3,3469.68 4383.62,3485.04 4373.38,3485.04
  region net PC13: 4319.31,3430.31 4293.82,3430.31 4283.92,3414.96 4298.4,3414.96
  region net PC13: 4329.25,3462.8 4329.25,3437.2 4340.8,3444.88 4340.8,3455.12
  region net R6_2: 4365.75,3312.2 4365.75,3337.8 4354.2,3330.12 4354.2,3319.88
  region net PC14: 4334.25,3327.47 4321.45,3305.31 4335.44,3298.83 4340.73,3308
  region net R7_2: 4401.18,3182.8 4401.18,3157.2 4412.7,3164.88 4412.7,3175.12
  region net PC15: 4298.82,3160.29 4298.82,3185.88 4290.92,3188.22 4287.3,3177.36
  region net R8_2: 4365.71,3059.68 4391.3,3059.68 4383.62,3071.2 4373.38,3071.2
  region net PF0: 4293.82,3027.2 4293.82,3052.8 4282.3,3045.12 4282.3,3034.88
  region net PF0: 4329.25,3052.8 4329.25,3027.2 4340.8,3034.88 4340.8,3045.12
  region net R9_2: 4370.71,2924.68 4396.3,2924.68 4388.62,2936.2 4378.38,2936.2
  region net PF1: 4303.7,2924.68 4329.29,2924.68 4321.62,2928.4 4311.38,2928.4
  region net 3V3: 4579.57,3067.2 4579.57,3092.8 4568.1,3085.12 4568.1,3074.88
  region net 3V3: 3334,3637.2 3334,3662.8 3322.5,3655.12 3322.5,3644.88
  region net PB7: 3577.04,2146.79 3577.04,2164.81 3585.45,2160.92 3585.45,2150.68
  region net PB10: 2417.69,2226.05 2404.95,2238.78 2413.64,2241.98 2420.88,2234.74
  region net PA10: 2343.64,3123.49 2343.64,3141.51 2352.05,3137.62 2352.05,3127.38
  region net PC15: 2838.19,3024.85 2825.45,3012.11 2834.14,3008.92 2841.38,3016.16
  region net BOOT1: 2361.65,2991.58 2348.92,2978.85 2345.72,2987.54 2352.96,2994.78
  region net PC14: 2590.38,3246.95 2577.65,3259.68 2586.34,3262.88 2593.58,3255.64
  region net PC14: 3777.46,3578.79 3777.46,3596.81 3769.05,3592.92 3769.05,3582.68
  region net PB4: 3677.06,2200.19 3677.06,2218.21 3668.65,2214.32 3668.65,2204.08
  region net 3V3: 2494.19,3677.44 2511.32,3671.87 2510.81,3680.87 2499.88,3684.42
  region net 3V3: 3449.26,2792.79 3449.26,2810.81 3440.85,2806.92 3440.85,2796.68
  region net 3V3: 3465.14,2792.79 3465.14,2810.81 3473.55,2806.92 3473.55,2796.68
  region net 3V3: 3395.56,3039.1 3384.1,3025.2 3392.09,3021.68 3400.53,3031.92
  region net 3V3: 3383.3,3025.2 3371.84,3039.1 3366.87,3031.92 3375.31,3021.68
  region net 3V3: 3379.03,3026.14 3373.31,3043.21 3366.38,3037.42 3370.02,3026.58
  region net 3V3: 3952.24,3382.79 3952.24,3400.81 3960.65,3396.92 3960.65,3386.68
  region net 3V3: 3936.36,3382.79 3936.36,3400.81 3927.95,3396.92 3927.95,3386.68
  region net PB0: 2461.58,2995.55 2448.85,2982.82 2457.54,2979.62 2464.78,2986.86
  region net PB0: 3497.06,2864.19 3497.06,2882.21 3488.65,2878.32 3488.65,2868.08
  region net PB0: 3512.94,2864.19 3512.94,2882.21 3521.35,2878.32 3521.35,2868.08
  region net PB1: 2412.04,2369.19 2412.04,2387.21 2420.45,2383.32 2420.45,2373.08
  region net PB1: 3600.04,2600.29 3600.04,2618.31 3608.45,2614.42 3608.45,2604.18
  region net PB14: 3665.76,3177.12 3653.01,3189.84 3649.83,3181.14 3657.07,3173.91
  region net PB14: 2198.58,2992.44 2185.85,3005.19 2194.55,3008.38 2201.78,3001.13
  region net PB14: 3895.76,2639.19 3895.76,2657.21 3887.35,2653.32 3887.35,2643.08
  region net PB14: 3911.64,2639.19 3911.64,2657.21 3920.05,2653.32 3920.05,2643.08
  region net PB15: 2340.44,3041.69 2340.44,3059.71 2348.85,3055.82 2348.85,3045.58
  region net PB15: 3698.72,3062.15 3698.39,3080.16 3690.06,3076.12 3690.25,3065.88
  region net PF1: 2723.44,3020.11 2740.07,3027.03 2740.1,3017.94 2729.88,3013.68
  region net PF1: 4470.95,3055.12 4458.22,3067.85 4455.02,3059.16 4462.26,3051.92
  region net USBDP: 2177.45,3309.48 2164.71,3296.75 2161.52,3305.44 2168.76,3312.68
  region net USBDP: 2049.49,3512.06 2067.51,3512.06 2063.62,3503.65 2053.38,3503.65
  region net USBDP: 2050.56,3510.99 2050.56,3529.01 2042.15,3525.12 2042.15,3514.88
  region net R9_2: 4379.35,2940.78 4395.36,2932.51 4388.62,2926.53 4378.38,2931.82
  region net R8_2: 4374.59,3076.31 4390.43,3067.72 4383.62,3061.85 4373.38,3067.41
  region net R7_2: 4426.65,3173.22 4413.91,3185.95 4410.72,3177.26 4417.96,3170.02
  region net R6_2: 4343.41,3348.3 4360.88,3352.7 4359.32,3343.64 4349.08,3341.06
  region net R5_2: 4388.1,3547.52 4370.14,3548.84 4373.38,3540.17 4383.62,3539.42
  region net PC13: 2510.67,3042.64 2502.84,3058.86 2511.86,3059.52 2516.79,3049.28
  region net PF0: 2773.19,3029.35 2760.45,3016.62 2769.14,3013.42 2776.38,3020.66
  region net USBDM: 2159.09,3360.54 2177.11,3360.54 2173.22,3368.95 2162.98,3368.95
  region net NRST: 1760.09,2691.05 1747.35,2678.32 1756.04,2675.12 1763.28,2682.36
  region net PB11: 2361.89,2248.28 2349.11,2260.98 2357.8,2264.2 2365.05,2256.99
  region net PB12: 2314.84,2273.69 2314.84,2291.71 2323.25,2287.82 2323.25,2277.58
  region net PB13: 2364.78,3027.85 2352.05,3015.12 2360.74,3011.92 2367.98,3019.16
  region net PB13: 3706.95,2484.68 3694.22,2471.95 3691.88,2479.78 3699.12,2487.02
  region net SWDCLK: 2265.35,3250.32 2252.62,3263.05 2249.42,3254.36 2256.66,3247.12
  region net BOOT0: 3511.29,2419.46 3498.53,2432.18 3507.22,2435.39 3514.47,2428.16
  region net BOOT0: 3613.96,2450.89 3613.96,2468.91 3605.55,2465.02 3605.55,2454.78
  region net PB3: 3717.41,2237.11 3709.37,2220.99 3703.32,2227.68 3708.42,2237.92
  region net SWDCLK: 1802.13,3059.9 1802.13,3110.1 1825.56,3090.12 1825.56,3079.88
  region net PB12: 4174.64,2077.78 4212.22,2115.36 4179.51,2117.73 4172.27,2110.49
  region net PB11: 4074.64,2077.78 4112.22,2115.36 4079.51,2117.73 4072.27,2110.49
  region net PB10: 3974.64,2077.78 4012.22,2115.36 3979.51,2117.73 3972.27,2110.49
  region net PB7: 3674.64,2077.78 3712.22,2115.36 3679.51,2117.73 3672.27,2110.49
  region net PB4: 3407.8,2115.36 3445.36,2077.77 3447.74,2110.48 3440.51,2117.72
  region net PB3: 3307.78,2115.36 3345.36,2077.78 3347.73,2110.49 3340.49,2117.73
  region net 3V3: 2936.56,3658.43 2936.56,3711.57 2911.76,3690.12 2911.76,3679.88
  region net BOOT1: 3091.18,3701.84 3072.81,3651.96 3103.32,3663.04 3107.22,3673.62
  region net PF0: 4612.78,3444.64 4650.36,3482.22 4652.73,3449.51 4645.49,3442.27
  region net PC15: 4595.42,3409.53 4588.15,3356.88 4566.51,3381.48 4567.92,3391.72
  region net PC14: 4591.56,3253.43 4591.56,3306.57 4566.76,3285.12 4566.76,3274.88
  region net PC13: 4612.78,3215.36 4650.36,3177.78 4652.73,3210.49 4645.49,3217.73
  region net PA15: 4063.06,3619.06 4095.94,3651.94 4098.46,3623.78 4091.22,3616.54
  region net BOOT1: 3934.06,3648.06 3966.94,3680.94 3938.78,3683.46 3931.54,3676.22
  region net BOOT1: 3934.06,3651.94 3966.94,3619.06 3938.78,3616.54 3931.54,3623.78
  region net PA10: 3877.04,3621.44 3835.15,3641.62 3841.79,3614.33 3851.56,3609.63
Bottom Layer:
  region net 3V3: 2513.78,3247.31 2513.78,3221.72 2521.68,3219.38 2525.3,3230.24
  region net PB9: 2474.41,3269.37 2463.39,3269.37 2463.78,3275.5 2474.02,3275.5
  region net PB8: 2454.72,3269.37 2443.7,3269.37 2444.08,3281.59 2454.32,3281.6
  region net BOOT0: 2435.04,3269.35 2424.02,3269.39 2424.48,3284.75 2434.72,3284.7
  region net PB7: 2415.35,3269.35 2404.33,3269.39 2404.78,3284.74 2415.02,3284.7
  region net PB6: 2395.67,3269.36 2384.65,3269.38 2385.08,3284.74 2395.32,3284.71
  region net PB5: 2375.98,3269.36 2364.96,3269.38 2365.38,3284.73 2375.62,3284.71
  region net PB4: 2356.3,3269.37 2345.28,3269.37 2345.68,3284.73 2355.92,3284.72
  region net PB3: 2336.61,3269.37 2325.59,3269.37 2325.98,3284.72 2336.22,3284.72
  region net PA15: 2316.93,3269.38 2305.91,3269.36 2306.28,3284.72 2316.52,3284.73
  region net SWDCLK: 2286.22,3227.79 2286.22,3253.38 2270.86,3263.26 2270.86,3248.75
  region net 3V3: 2270.5,3193.78 2270.45,3182.76 2285.8,3183.08 2285.85,3193.32
  region net 3V3: 2227.2,3193.78 2252.8,3193.78 2245.12,3209.14 2234.88,3209.14
  region net SWDIO: 2210.63,3143.39 2210.63,3154.41 2204.9,3154.02 2204.9,3143.78
  region net USBDP: 2210.63,3123.7 2210.63,3134.72 2197.2,3134.32 2197.2,3124.08
  region net USBDM: 2210.64,3104.02 2210.62,3115.04 2195.27,3114.62 2195.29,3104.38
  region net PA10: 2270.49,3095.35 2270.46,3084.33 2285.81,3084.68 2285.84,3094.92
  region net PA9: 2210.65,3064.65 2210.61,3075.67 2196.88,3075.22 2196.92,3064.98
  region net PB15: 2270.47,3025.28 2270.47,3036.3 2285.82,3035.92 2285.83,3025.68
  region net PB14: 2210.63,3005.59 2210.63,3016.61 2204.5,3016.22 2204.5,3005.98
  region net PB13: 2270.48,2996.93 2270.46,2985.91 2285.82,2986.28 2285.83,2996.52
  region net PB12: 2252.8,2966.22 2227.2,2966.22 2234.88,2950.86 2245.12,2950.86
  region net 3V3: 2297.24,2950.41 2286.22,2950.53 2286.68,2956.95 2296.92,2956.84
  region net PB11: 2336.61,2890.63 2325.59,2890.63 2325.98,2875.28 2336.22,2875.28
  region net PB10: 2356.3,2890.63 2345.28,2890.63 2345.68,2875.27 2355.92,2875.28
  region net BOOT1: 2375.98,2950.46 2364.96,2950.48 2365.38,2965.83 2375.62,2965.82
  region net PB1: 2395.67,2890.64 2384.65,2890.62 2385.08,2875.26 2395.32,2875.29
  region net PA7: 2435.04,2890.65 2424.02,2890.61 2424.48,2875.25 2434.72,2875.3
  region net PA6: 2454.72,2890.63 2443.7,2890.63 2444.08,2875.28 2454.32,2875.27
  region net PA5: 2474.41,2890.63 2463.39,2890.63 2463.78,2875.28 2474.02,2875.28
  region net PA4: 2494.09,2890.64 2483.07,2890.62 2483.48,2875.27 2493.72,2875.28
  region net PA3: 2513.78,2928.41 2513.78,2902.82 2529.14,2893.03 2529.14,2907.5
  region net PA2: 2577.47,2966.22 2551.88,2966.22 2572.8,2950.86 2587.27,2950.86
  region net PA1: 2589.38,2996.93 2589.36,2985.91 2598.19,2986.28 2598.21,2996.52
  region net PA0: 2589.37,3005.59 2589.37,3016.61 2604.72,3016.22 2604.72,3005.98
  region net 3V3: 2529.57,3025.28 2529.49,3036.3 2516.26,3035.82 2516.33,3025.58
  region net NRST: 2589.39,3075.67 2589.35,3064.65 2604.7,3064.98 2604.74,3075.22
  region net PF1: 2589.38,3095.35 2589.36,3084.33 2604.71,3084.68 2604.74,3094.92
  region net PF0: 2589.38,3115.04 2589.36,3104.02 2604.71,3104.38 2604.73,3114.62
  region net PC15: 2589.37,3134.72 2589.37,3123.7 2604.72,3124.08 2604.73,3134.32
  region net PC14: 2589.37,3143.39 2589.37,3154.41 2596.7,3154.02 2596.7,3143.78
  region net PC13: 2529.58,3163.07 2529.49,3174.09 2519.76,3173.62 2519.84,3163.38
  region net 3V3: 2540.82,3193.78 2566.41,3193.78 2545.5,3209.14 2531.03,3209.14
  region net 3V3: 4459.29,3036.65 4433.7,3036.65 4441.38,3052.01 4451.62,3052.01
  region net 3V3: 4466.18,3002.2 4466.18,3027.8 4477.7,3020.12 4477.7,3009.88
  region net 3V3: 4433.7,2993.35 4459.29,2993.35 4451.62,2977.99 4441.38,2977.99
  region net R9_2: 4370.71,2993.35 4396.3,2993.35 4388.62,2977.99 4378.38,2977.99
  region net 3V3: 4438.7,3493.35 4464.29,3493.35 4456.62,3477.99 4446.38,3477.99
  region net R5_2: 4401.3,3536.65 4375.71,3536.65 4383.38,3548.2 4393.62,3548.2
  region net 3V3: 4464.29,3406.65 4438.7,3406.65 4446.38,3420.9 4456.62,3420.9
  region net 3V3: 4438.7,3363.35 4464.29,3363.35 4456.62,3351.8 4446.38,3351.8
  region net R6_2: 4368.82,3397.8 4368.82,3372.2 4357.3,3379.88 4357.3,3390.12
  region net 3V3: 4443.7,3243.35 4469.29,3243.35 4461.62,3227.99 4451.38,3227.99
  region net 3V3: 4469.29,3286.65 4443.7,3286.65 4451.38,3298.2 4461.62,3298.2
  region net R7_2: 4380.71,3243.35 4406.3,3243.35 4398.62,3227.99 4388.38,3227.99
  region net 3V3: 4466.18,3166.65 4443.7,3166.65 4451.38,3182.01 4461.62,3182.01
  region net 3V3: 4433.7,3123.35 4459.29,3123.35 4451.62,3107.99 4441.38,3107.99
  region net R8_2: 4370.71,3123.35 4396.3,3123.35 4388.62,3107.99 4378.38,3107.99
  region net USBDP: 2118.82,3452.8 2118.82,3427.2 2107.3,3434.88 2107.3,3445.12
  region net 3V3: 2181.81,3452.8 2181.81,3427.2 2170.3,3434.88 2170.3,3445.12
  region net 3V3: 2221.18,3427.2 2221.18,3452.8 2232.7,3445.12 2232.7,3434.88
  region net BOOT0: 2425.2,3612.6 2450.79,3612.6 2443.12,3601.1 2432.88,3601.1
  region net 3V3: 1819.29,2756.65 1793.7,2756.65 1801.38,2772.01 1811.62,2772.01
  region net NRST: 1730.71,2713.35 1756.3,2713.35 1748.62,2697.99 1738.38,2697.99
  region net BOOT1: 2675.2,3687.4 2700.79,3687.4 2693.12,3698.9 2682.88,3698.9
  region net 3V3: 1767.2,2918.46 1792.8,2918.46 1785.12,2930 1774.88,2930
  region net 3V3: 1792.8,2851.54 1767.2,2851.54 1774.88,2840 1785.12,2840
  region net 3V3: 2947.2,3620.43 2972.8,3620.43 2965.12,3635.79 2954.88,3635.79
  region net 3V3: 4579.57,3067.2 4579.57,3092.8 4564.21,3085.12 4564.21,3074.88
  region net 3V3: 3377.8,3619 3352.2,3619 3359.88,3603.64 3370.12,3603.64
  region net PB7: 3560.1,2163.74 3578.11,2163.74 3574.22,2172.15 3563.98,2172.15
  region net PB10: 2406.45,2238.78 2393.72,2226.05 2390.52,2234.74 2397.76,2241.98
  region net PA10: 2336.45,3120.52 2323.72,3133.25 2320.52,3124.56 2327.76,3117.32
  region net PC15: 2826.96,3036.08 2814.22,3023.35 2811.03,3032.05 2818.27,3039.28
  region net BOOT1: 2372.89,2980.35 2360.15,2967.62 2366.88,2966.38 2374.12,2973.62
  region net PC14: 2590.38,3248.43 2577.63,3235.72 2586.31,3232.51 2593.56,3239.73
  region net PC14: 3797.38,3588.55 3784.65,3575.82 3793.34,3572.62 3800.58,3579.86
  region net PB4: 3675.99,2217.14 3694.01,2217.14 3690.12,2225.55 3679.88,2225.55
  region net 3V3: 2491.29,3675.04 2509.3,3675.04 2505.42,3683.45 2495.18,3683.45
  region net 3V3: 3457.95,2813.78 3445.22,2801.04 3442.02,2809.73 3449.25,2816.97
  region net 3V3: 3374.7,3029.26 3392.71,3029.26 3388.82,3020.85 3378.58,3020.85
  region net 3V3: 3384.45,3049.18 3371.72,3036.45 3368.52,3045.14 3375.76,3052.38
  region net 3V3: 3956.29,3391.05 3943.55,3403.78 3952.24,3406.98 3959.48,3399.74
  region net PB0: 2450.35,2982.82 2437.62,2995.55 2434.42,2986.86 2441.66,2979.62
  region net PB0: 3505.75,2885.19 3493.02,2872.45 3489.82,2881.14 3497.06,2888.38
  region net PB1: 2404.85,2390.19 2392.11,2377.45 2388.92,2386.14 2396.16,2393.38
  region net PB1: 3583.09,2617.24 3601.11,2617.24 3597.22,2625.65 3586.98,2625.65
  region net PB14: 3655.99,3181.16 3674.01,3181.16 3670.12,3172.75 3659.88,3172.75
  region net PB14: 3655.99,3197.04 3674.01,3197.04 3670.12,3205.45 3659.88,3205.45
  region net PB14: 2198.58,2992.45 2185.85,3005.19 2194.54,3008.38 2201.78,3001.14
  region net PB14: 3904.45,2660.19 3891.72,2647.45 3888.52,2656.14 3895.76,2663.38
  region net PB15: 2333.25,3038.72 2320.52,3051.45 2317.32,3042.76 2324.56,3035.52
  region net PB15: 3697.49,3079.24 3715.51,3079.24 3711.62,3087.65 3701.38,3087.65
  region net PF1: 2729.45,3042.89 2716.72,3030.15 2713.52,3038.84 2720.76,3046.08
  region net PF1: 4482.18,3066.35 4469.45,3079.08 4478.14,3082.28 4485.38,3075.04
  region net USBDP: 2184.33,3288.23 2166.54,3291.09 2168.98,3282.18 2179.22,3280.54
  region net USBDP: 2070.49,3520.75 2057.75,3508.02 2066.44,3504.82 2073.68,3512.06
  region net R9_2: 4379.35,2946.63 4395.36,2954.89 4388.62,2960.87 4378.38,2955.59
  region net R8_2: 4393.81,3088.37 4376.07,3085.28 4378.38,3094.22 4388.62,3095.99
  region net R7_2: 4426.63,3197.19 4413.92,3184.43 4410.71,3193.12 4417.93,3200.37
  region net R6_2: 4345.54,3369.27 4361.76,3361.44 4362.42,3370.46 4352.18,3375.39
  region net R5_2: 4376.39,3544.56 4391.57,3554.25 4393.62,3545.59 4383.38,3539.05
  region net PC13: 2490.59,3055.24 2508.61,3055.24 2504.72,3063.65 2494.48,3063.65
  region net PF0: 2763.5,3040.39 2749.22,3029.41 2747.15,3038.42 2755.33,3044.71
  region net USBDM: 2168.85,3340.62 2156.12,3353.35 2152.92,3344.66 2160.16,3337.42
  region net NRST: 1739.09,2682.36 1757.11,2682.36 1753.22,2673.95 1742.98,2673.95
  region net NRST: 1754.51,2700.46 1737.22,2695.39 1738.38,2704.49 1748.62,2707.49
  region net PB11: 2350.65,2260.98 2337.92,2248.25 2334.72,2256.94 2341.96,2264.18
  region net PB12: 2307.65,2294.68 2294.91,2281.95 2291.72,2290.64 2298.96,2297.88
  region net PB13: 2344.86,3018.09 2344.86,3036.11 2336.45,3032.22 2336.45,3021.98
  region net PB13: 3714.14,2463.69 3714.14,2481.71 3722.55,2477.82 3722.55,2467.58
  region net SWDCLK: 2276.59,3263.02 2263.82,3250.32 2272.51,3247.1 2279.76,3254.32
  region net BOOT0: 3505.76,2430.32 3488.45,2425.35 3489.17,2434.3 3500.41,2437.53
  region net BOOT0: 3622.65,2471.88 3609.91,2459.15 3606.72,2467.84 3613.96,2475.08
  region net PB3: 3711.49,2233.44 3729.5,2233.44 3725.62,2241.85 3715.38,2241.85
  region net SWDIO: 1813.15,2989.58 1771.31,3017.32 1800.82,3025.86 1809.53,3020.09
  region net PA9: 2929.64,2082.22 2967.22,2044.64 2934.51,2042.27 2927.27,2049.51
  region net PA8: 2829.64,2082.22 2867.22,2044.64 2834.51,2042.27 2827.27,2049.51
  region net PA7: 2729.64,2082.22 2767.22,2044.64 2734.51,2042.27 2727.27,2049.51
  region net PA6: 2629.64,2082.22 2667.22,2044.64 2634.51,2042.27 2627.27,2049.51
  region net PA5: 2529.64,2077.78 2567.22,2115.36 2534.51,2117.73 2527.27,2110.49
  region net PA4: 2462.78,2044.64 2500.36,2082.22 2502.73,2049.51 2495.49,2042.27
  region net PA3: 2362.78,2044.64 2400.36,2082.22 2402.73,2049.51 2395.49,2042.27
  region net PA2: 2262.78,2044.64 2300.36,2082.22 2302.73,2049.51 2295.49,2042.27
  region net PA0: 2062.78,2044.64 2100.36,2082.22 2102.73,2049.51 2095.49,2042.27
  region net 3V3: 4407.78,2115.36 4445.36,2077.78 4447.73,2110.49 4440.49,2117.73
  region net PB13: 4274.64,2077.78 4312.22,2115.36 4279.51,2117.73 4272.27,2110.49
  region net PB9: 3874.64,2082.22 3912.22,2044.64 3879.51,2042.27 3872.27,2049.51
  region net PB8: 3774.64,2082.22 3812.22,2044.64 3779.51,2042.27 3772.27,2049.51
  region net PB6: 3636.57,2103.44 3583.43,2103.44 3604.88,2128.24 3615.12,2128.24
  region net PB5: 3507.78,2044.64 3545.36,2082.22 3547.73,2049.51 3540.49,2042.27
  region net 3V3: 2986.57,3661.56 2933.43,3661.56 2954.88,3636.76 2965.12,3636.76
  region net BOOT0: 3024.64,3587.22 3062.22,3549.64 3029.51,3547.27 3022.27,3554.51
  region net BOOT1: 3024.64,3682.78 3062.22,3720.36 3029.51,3722.73 3022.27,3715.49
  region net PF1: 4612.78,3544.64 4650.36,3582.22 4652.73,3549.51 4645.49,3542.27
  region net PC14: 4579.64,3277.78 4617.22,3315.36 4584.51,3317.73 4577.27,3310.49
  region net PA15: 4034.06,3648.06 4066.94,3680.94 4038.78,3683.46 4031.54,3676.22
  region net PB15: 3734.06,3651.94 3766.94,3619.06 3738.78,3616.54 3731.54,3623.78
  region net PB14: 3688.25,3629.5 3641.75,3629.5 3659.88,3607.8 3670.12,3607.8
  region net PB1: 3563.06,3619.06 3595.94,3651.94 3595.72,3626.52 3588.48,3619.28
  region net PB0: 3488.25,3629.5 3441.75,3629.5 3459.88,3607.8 3470.12,3607.8

## Silkscreen, mask and mechanical layers (free items; w line width, h text height)
Top Overlay:
  lines w10: 1990,1835 4485,1835 4485,2265 1990,2265 1990,1835 ; 2105,2305 2735,2305 2735,3445 2105,3445 2105,2305 ; 2760,2270 4225,2270 4225,3527.5 2760,3527.5 2760,2270
  text "LED采用独立IO驱动（可组合）" at 4740,2985 h59.05 r90
  text "mouse control" at 2900,2408.35 h43.31
  text "STM32F072C8T6核心板" at 2240,2375 h59.05 r90
  text "V1.0.0 BY 何亚红" at 2470,2370 h59.05 r90
  text "虚拟USB-HID鼠标键盘验证板" at 2350,2365 h59.05 r90
  text "鼠标采用独立按键（按键可组合）" at 3620,2295 h43.31
  text "键盘采用扫描按键（某些按键不可组合）" at 2450,2140 h78.74
Bottom Overlay:
  text "BOOT1" at 3110,3728.19 h23.62
  text "3V3" at 2915,3613.19 h23.62
  text "GND" at 3255,3608.19 h23.62
  text "3V3" at 3386.81,3605 h23.62 r90
  text "PB15-left" at 3781.81,3605 h23.62 r90
  text "PB1-down" at 3596.81,3600 h23.62 r90
  text "PB14-right" at 3696.81,3600.21 h23.62 r91
  text "PA10-l_click" at 3896.81,3600 h23.62 r90
  text "PB2-m_click" at 4001.81,3600 h23.62 r90
  text "PB0-up" at 3486.78,3595.82 h23.62 r94
  text "GND" at 4191.81,3595 h23.62 r90
  text "PA15-r_click" at 4091.81,3590 h23.62 r90
  text "PF1-L5" at 4780,3563.19 h23.62
  text "BOOT0" at 3115,3488.19 h23.62
  text "PF0-L4" at 4785,3453.19 h23.62
  text "PC15-L3" at 4800,3358.19 h23.62
  text "PC14-L2" at 4800,3258.19 h23.62
  text "GND" at 1910,3158.19 h23.62
  text "PC13-L1" at 4795,3153.19 h23.62
  text "SWDCLK" at 1960,3063.19 h23.62
  text "3V3" at 4770,3043.19 h23.62
  text "SWDIO" at 1925,2963.19 h23.62
  text "3V3" at 1900,2863.19 h23.62
  text "HYH" at 4385,2363.82 h102.36
  text "PB12" at 4221.81,2220 h23.62 r90
  text "PB13" at 4321.81,2220 h23.62 r90
  text "PA0" at 2076.81,2210 h23.62 r90
  text "PA6" at 2691.81,2210 h23.62 r90
  text "PA7" at 2791.81,2210 h23.62 r90
  text "PA9" at 2991.81,2210 h23.62 r90
  text "GND" at 3091.81,2210 h23.62 r90
  text "GND" at 3191.81,2210 h23.62 r90
  text "3V3" at 4426.81,2210 h23.62 r90
  text "PA1" at 2186.81,2205 h23.62 r90
  text "PA3" at 2386.81,2205 h23.62 r90
  text "PA4" at 2481.81,2205 h23.62 r90
  text "PA8" at 2891.81,2205 h23.62 r90
  text "PB4" at 3426.81,2205 h23.62 r90
  text "PB5" at 3526.81,2205 h23.62 r90
  text "PB10" at 4031.81,2205 h23.62 r90
  text "PB11" at 4136.81,2205 h23.62 r90
  text "PA2" at 2291.81,2200 h23.62 r90
  text "PA5" at 2581.81,2200 h23.62 r90
  text "PB3" at 3331.81,2200 h23.62 r90
  text "PB6" at 3641.81,2200 h23.62 r90
  text "PB7" at 3736.81,2200 h23.62 r90
  text "PB8" at 3831.81,2200 h23.62 r90
  text "PB9" at 3931.81,2195 h23.62 r90
  text "OUT1" at 2091.81,2020 h23.62 r90
  text "OUT9" at 2891.81,2020 h23.62 r90
  text "OUT10" at 2981.81,2020 h23.62 r90
  text "OUTG" at 3086.81,2020 h23.62 r90
  text "IN1" at 3341.81,2020 h23.62 r90
  text "IN2" at 3436.81,2020 h23.62 r90
  text "OUT2" at 2186.81,2015 h23.62 r90
  text "OUT3" at 2301.81,2015 h23.62 r90
  text "OUT8" at 2786.81,2015 h23.62 r90
  text "OUTG" at 3181.81,2015 h23.62 r90
  text "IN3" at 3531.81,2015 h23.62 r90
  text "IN4" at 3626.81,2015 h23.62 r90
  text "IN5" at 3731.81,2015 h23.62 r90
  text "IN7" at 3931.81,2015 h23.62 r90
  text "OUT4" at 2386.81,2010 h23.62 r90
  text "OUT5" at 2486.81,2010 h23.62 r90
  text "OUT6" at 2591.81,2010 h23.62 r90
  text "OUT7" at 2686.81,2010 h23.62 r90
  text "IN6" at 3836.81,2010 h23.62 r90
  text "IN9" at 4136.81,2010 h23.62 r90
  text "IN8" at 4031.81,2005 h23.62 r90
  text "IN11" at 4326.81,2005 h23.62 r90
  text "IN10" at 4226.81,2000 h23.62 r90
  text "INV" at 4426.81,2000 h23.62 r90
Document:
  lines w0.1: 3259,2784 3261,2786